# Altium PCB PCB_16522098.PcbDoc
Units mil, origin at the board's own origin, x right, y up, seen from the top; angles counter-clockwise.
Board outline 4110.36 x 4795.8 mil, 2 copper layers (Top Layer, Bottom Layer); 30 components, 82 nets, 286 pads, 46 vias.
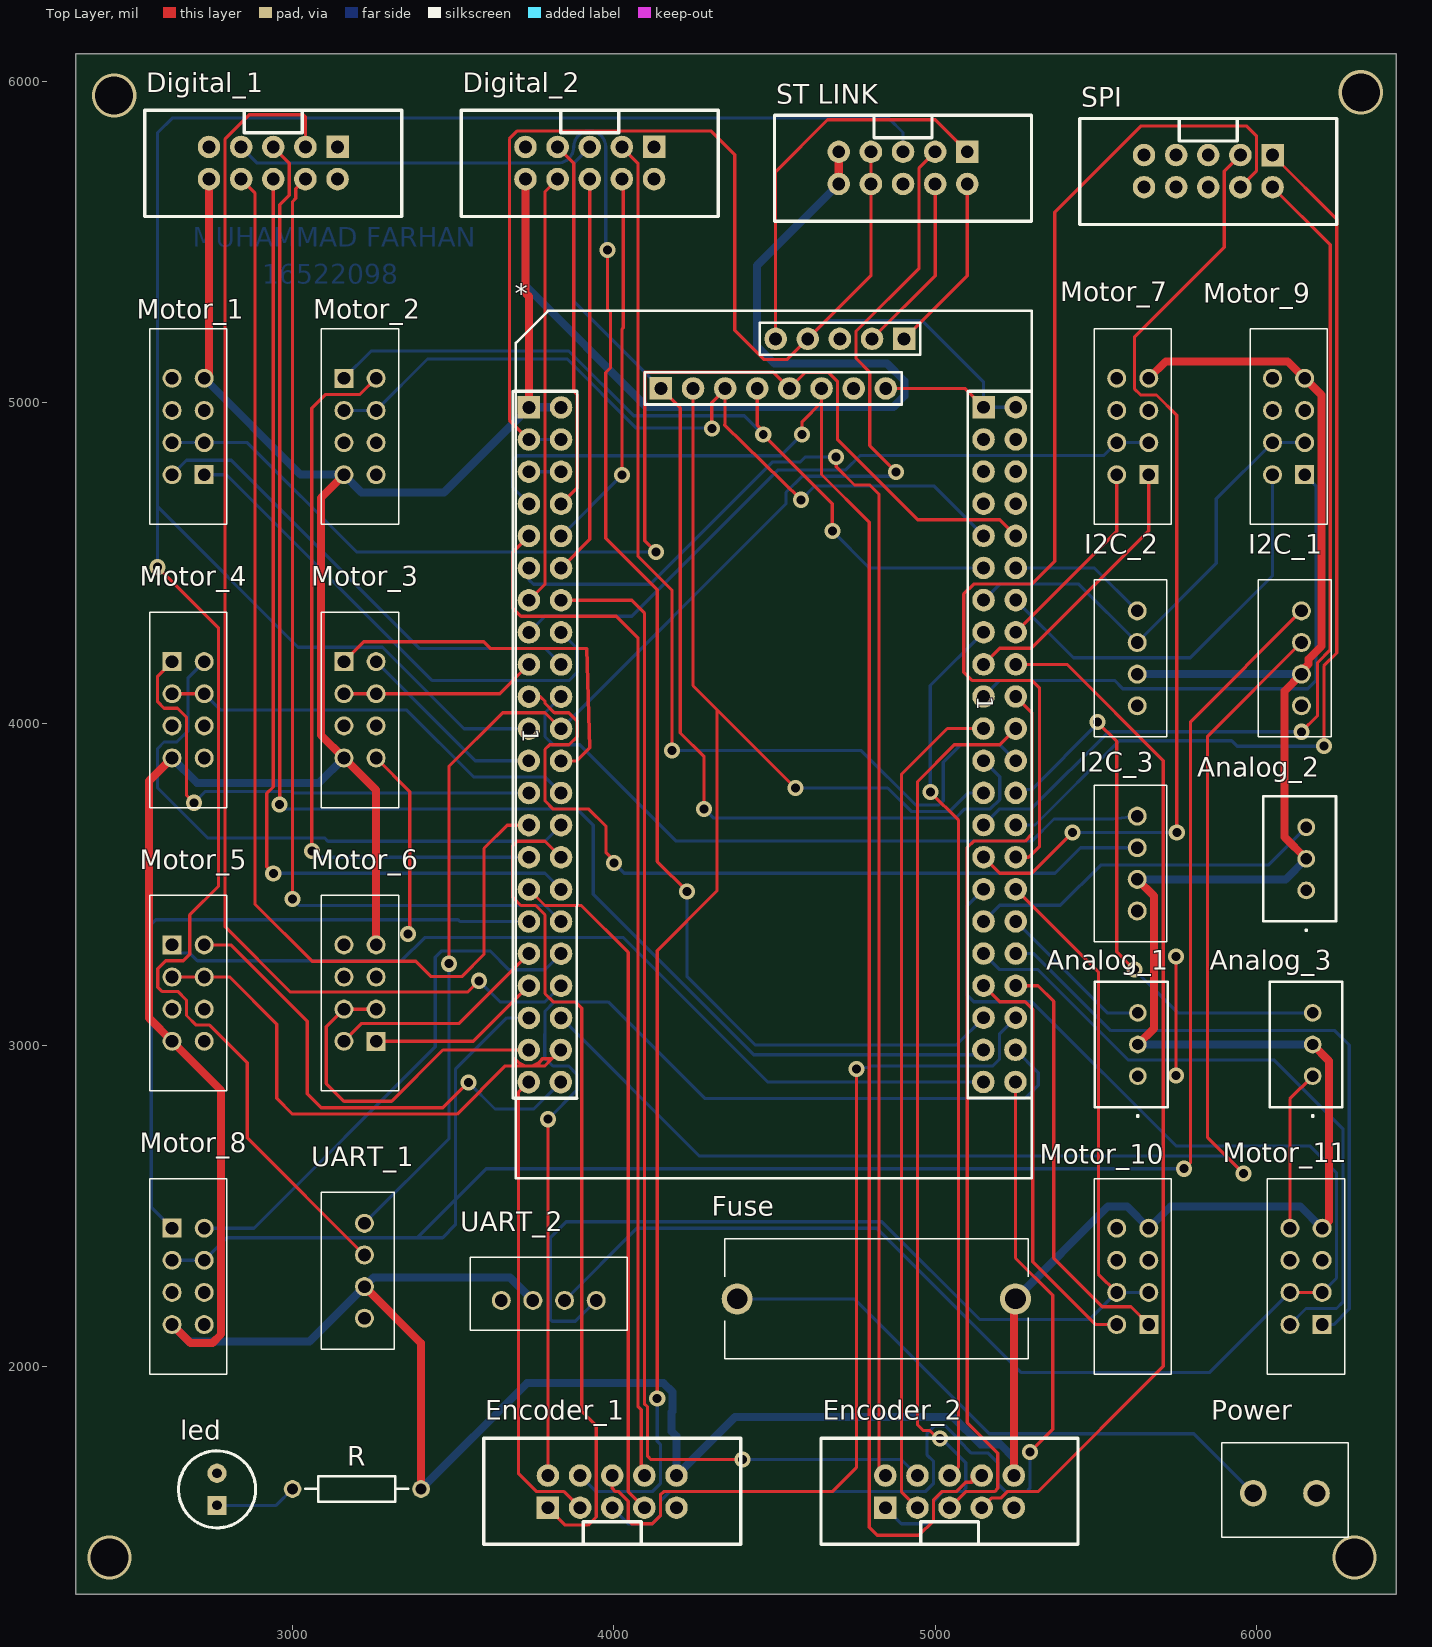
[diagram p0: Top Layer view]
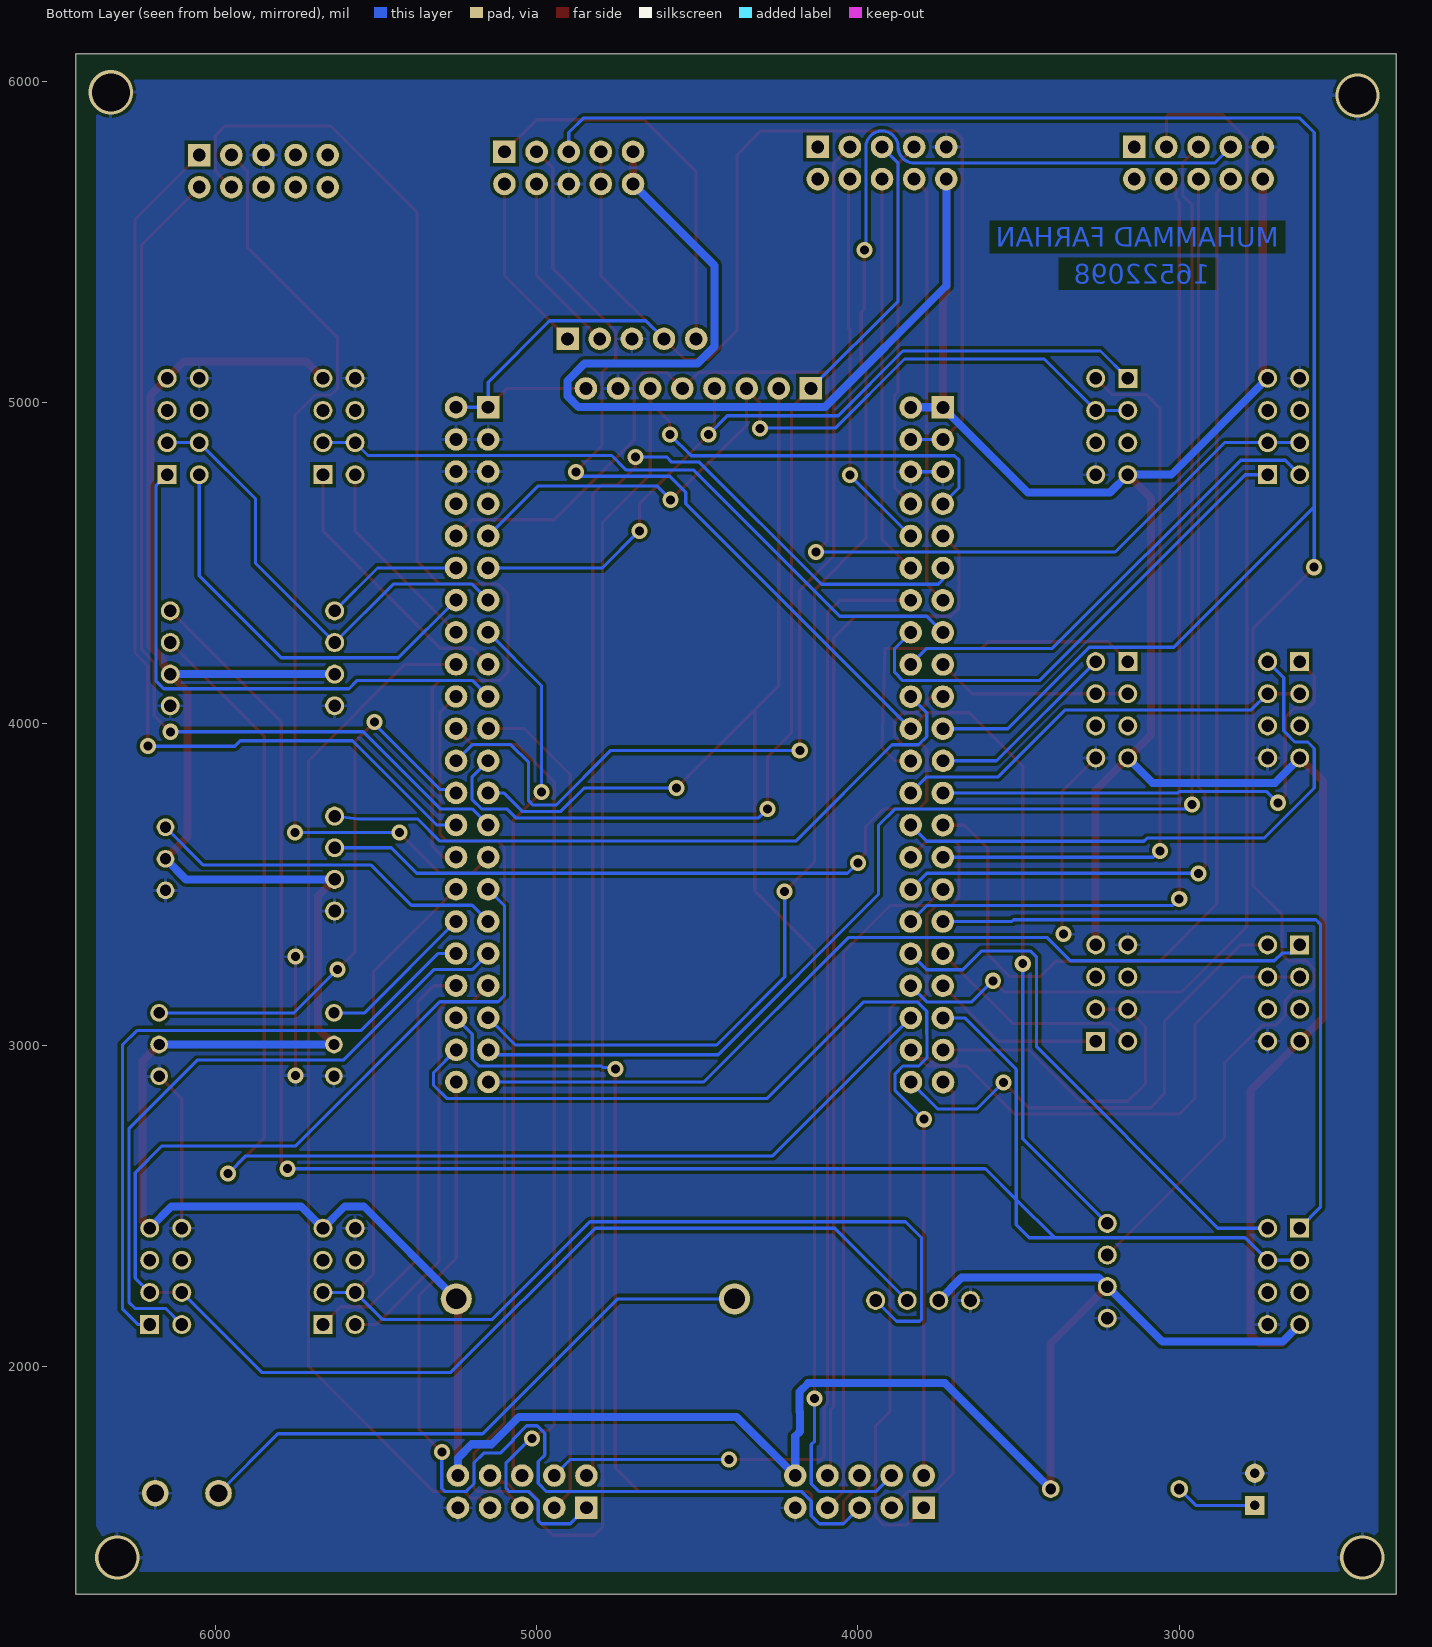
[diagram p1: Bottom Layer view, seen from below]

## Layer stack, top to bottom
Top Solder: solder mask 0.4, Solder Resist, Dk 3.5
Top Layer: signal copper 1.4
Dielectric 1: dielectric 12.6, FR-4, Dk 4.8
Bottom Layer: signal copper 1.4
Bottom Solder: solder mask 0.4, Solder Resist, Dk 3.5

## Board outline
2324.64,6085.8 6435,6085.8 6435,1290 2324.64,1290

## Design rules (kind name [scope] priority, off if disabled: settings)
Clearance [All] p1: gap=10 ignorepadtopadclearanceinfootprint=FALSE except(0: Arc-Hole Track-Hole SMDPad-Hole THPad-Hole Via-Hole Fill-Hole Poly-Hole Region-Hole Text-Hole)
PolygonConnect [All] p1: connectstyle=Relief reliefconductorwidth=10 reliefentries=4 polygonreliefangle="90 Angle" airgapwidth=10
RoutingVias [All] p1: holewidth=28 width=50 viastyle="Through Hole" minholewidth=28 minwidth=50 maxholewidth=28 maxwidth=50
SolderMaskExpansion [All] p1: expansion=4 istentingtop=FALSE
Width Power [InNet('5V')] p1: maxlimit=30 minlimit=20 preferedwidth=25 minimp=50.000000 maximp=50.000000 favimp=50.000000
Width Normal [All] p2: maxlimit=15 minlimit=10 preferedwidth=10 minimp=50.000000 maximp=50.000000 favimp=50.000000
30 further rules are at their usual default settings.

## Components (designator, comment, footprint, x,y, rotation, side; value= is the part's Value field where it differs from the comment)
* "STM32  F407VET6" MICON 4495.08,3935 r0 top
Analog_1 "B3B-XH-A_LF__SN_" B3BXHALFSN 5630.75,2903.15 r90 top
Analog_2 "B3B-XH-A_LF__SN_" B3BXHALFSN 6155,3481.12 r90 top
Analog_3 "B3B-XH-A_LF__SN_" B3BXHALFSN 6175,2903.15 r90 top
Digital_1 "Header ISP" "Header ISP" 3040,5895 r180 top
Digital_2 "Header ISP" "Header ISP" 4025,5895 r180 top
Encoder_1 "Header ISP" "Header ISP" 3895,1460 r0 top
Encoder_2 "Header ISP" "Header ISP" 4945,1460 r0 top
Fuse "C3131" C3131 5250,2210 r180 top (schematic designator Fuse?)
I2C_1 "B4B-XH-A_LF__SN_" B4BXHALFSN 6140,4055.88 r90 top
I2C_2 "B4B-XH-A_LF__SN_" B4BXHALFSN 5628.78,4055.88 r90 top
I2C_3 "B4B-XH-A_LF__SN_" B4BXHALFSN 5628.78,3417.15 r90 top
led "LED 5mm" "LED 5mm" 2765,1617.16 r90 top (schematic designator led?)
Motor_1 "Header ISP" 09181089622 2725,4775 r90 top
Motor_2 "Header ISP" 09181089622 3160,5075 r270 top
Motor_3 "Header ISP" 09181089622 3160,4193.33 r270 top
Motor_4 "Header ISP" 09181089622 2625,4193.33 r270 top
Motor_5 "Header ISP" 09181089622 2625,3311.67 r270 top
Motor_6 "Header ISP" 09181089622 3260,3011.67 r90 top
Motor_7 "Header ISP" 09181089622 5665,4775 r90 top
Motor_8 "Header ISP" 09181089622 2625,2430 r270 top
Motor_9 "Header ISP" 09181089622 6150,4775 r90 top
Motor_10 "Header ISP" 09181089622 5665,2130 r90 top
Motor_11 "Header ISP" 09181089622 6204.25,2130 r90 top
Power "KF301-2P" KF3012P 5990,1605.29 r0 top (schematic designator Power?)
R "Resistor 0.25W" "Resistor 0.25W" 3200,1618.28 r180 top (schematic designator R?)
SPI "Header ISP" "Header ISP" 5950,5870 r180 top
"ST LINK" "Header ISP" "Header ISP" 5000,5880 r180 top
UART_1 "B4B-XH-A_LF__SN_" B4BXHALFSN 3223.78,2149.72 r90 top
UART_2 "B4B-XH-A_LF__SN_" B4BXHALFSN 3649.72,2205 r0 top

## Footprints (in the part's own frame and the unit in brackets; to place one, negate y for a bottom-side part, rotate by r counter-clockwise, add the part's x,y. Pads: shape width x height; smd on the part's side, far side on the other; paste and mask are expansions set on the pad)
09181089622 [mm]
  rect 1.5x1.5 hole 1: 1(0,0)
  round 1.5 hole 1: 2(0,2.54) 3(2.54,0) 4(2.54,2.54) 5(5.08,0) 6(5.08,2.54) 7(7.62,0) 8(7.62,2.54)
  silkscreen extent -3.92,-1.78 11.54,4.32, body extent -3.92,-1.73 11.54,4.27, height 5.25
B3BXHALFSN [mm]
  round 1.4 hole 0.9: 1(0,0) 2(2.5,0) 3(5,0)
  silkscreen extent -3.2,-2.35 7.45,3.4, body extent -2.45,-2.35 7.45,3.4, height 7.09
B4BXHALFSN [mm]
  round 1.5 hole 1: 1(0,0) 2(2.5,0) 3(5,0) 4(7.5,0)
  silkscreen extent -2.45,-2.35 9.95,3.4, body extent -2.45,-2.35 9.95,3.4, height 7.52
C3131 [mm]
  round 2.46 hole 1.64: 1(0,0) 2(22,0)
  silkscreen extent -1,-4.75 23,4.75, body extent -1,-4.75 23,4.75, height 10.6
"Header ISP" [mil]
  rect 70x70 hole 40: 1(-100,100)
  round 70 hole 40: 2(-100,200) 3(0,100) 4(0,200) 5(100,100) 6(100,200) 7(200,100) 8(200,200) 9(300,100) 10(300,200)
  silkscreen extent -300,-14 500,316, body extent -300,-20 501,334, height 365
KF3012P [mm]
  round 2.1 hole 1.4: 1(0,0) 2(5,0)
  silkscreen extent -2.5,-3.5 7.5,4, body extent -2.99,-3.35 7.51,4.15, height 10
"LED 5mm" [mil]
  rect 60x60 hole 30: 1(-50,0)
  round 60 hole 30: 2(50,0)
  silkscreen extent -120,-120 120,120, body extent -117,-118 96,118, height 268
MICON [mil] "STM32F407VET6"
  round 70 hole 40: 3V3(-759.34,949.33) 3V3(-659.34,949.33) 3V3(108.46,1262.79) 3V3(351.3,1108.52) 3V3(755.69,1049.72) 5V(-659.34,1049.33) BOOT0(8.46,1262.79) GND(-759.34,849.33) GND(-659.34,849.33) GND(208.46,1262.79) GND(251.3,1108.52) GND(655.69,849.72) GND(655.69,949.72) GND(755.69,849.72) GND(755.69,949.72) PA0(755.69,-550.28) PA1(655.69,-550.28) PA2(755.69,-450.28) PA3(655.69,-450.28) PA4(755.69,-350.28) PA5(655.69,-350.28) PA6(755.69,-250.28) PA7(655.69,-250.28) PA8(-759.34,149.33) PA9(-659.34,49.33) PA10(-759.34,49.33) PA11(-659.34,-50.67) PA12(-760.12,-50.39) PA15(-659.34,-150.67) PB0(755.69,-50.28) PB1(655.69,-50.28) PB3(-659.34,-750.67) PB5(-759.34,-750.67) PB6(-659.34,-850.67) PB7(-759.34,-850.67) PB8(-660.12,-950.39) PB9(-760.12,-950.39) PB10(655.69,449.72) PB11(755.69,549.72) PB12(-48.7,1108.52) PB12(655.69,549.72) PB13(51.3,1108.52) PB13(755.69,649.72) PB14(-148.7,1108.52) PB14(655.69,649.72) PB15(-759.33,749.33) PB15(151.3,1108.52) PC0(755.69,-750.28) PC1(655.69,-750.28) PC2(755.69,-650.28) PC3(655.69,-650.28) PC4(755.69,-150.28) PC5(-248.7,1108.52) PC5(655.69,-150.28) PC6(-759.34,349.33) PC7(-659.34,249.33) PC8(-759.34,249.33) PC9(-659.34,149.33) PC10(-759.34,-150.67) PC11(-659.34,-250.67) PC12(-759.34,-250.67) PC13(655.69,-850.28) PD0(-659.34,-350.67) PD1(-759.34,-350.67) PD2(-659.34,-450.67) PD3(-759.34,-450.67) PD4(-659.34,-550.67) PD5(-759.34,-550.67) PD6(-659.34,-650.67) PD7(-759.34,-650.67) PD8(-659.33,749.33) PD9(-659.34,649.33) PD10(-759.34,649.33) PD11(-659.34,549.33) PD12(-759.34,549.33) PD13(-659.34,449.33) PD14(-759.34,449.33) PD15(-659.34,349.33) PE0(-660.12,-1050.39) PE1(-760.12,-1050.39) PE2(754.92,-1050) PE3(654.92,-1050) PE4(754.92,-950) PE5(654.92,-950) PE6(755.69,-850.28) PE7(755.69,49.72) PE8(654.92,50) PE9(755.69,149.72) PE10(655.69,149.72) PE11(755.69,249.72) PE12(655.69,249.72) PE13(755.69,349.72) PE14(655.69,349.72) PE15(755.69,449.72) SWDIO(308.46,1262.79) VDD(655.69,749.72) VREF(755.69,749.72)
  rect 70x70 hole 40: 3V3(655.69,1049.72) 5V(-759.34,1049.33) PB1(-348.7,1108.52) SWCLK(408.46,1262.79)
  silkscreen extent -809,-1350 806,1350, body extent -810,-1100 806,1313, height 327
"Resistor 0.25W" [mm]
  round 1.4 hole 0.85: 1(-5.08,0) 2(5.08,0)
  silkscreen extent -4.06,-1.02 4.06,1.02, body extent -5.35,-1.27 5.35,1.33, height 2.7

## Part data
*: library part Micon?, "STM32F407VET6"
Analog_1 Analog_2 Analog_3: "Connector", Arrow Part Number=B3B-XH-A(LF)(SN), Manufacturer_Name="JST (JAPAN SOLDERLESS TERMINALS)", Arrow Price/Stock=https://www.arrow.com/en/products/b3b-xh-a-lf-sn/jst-manufacturing?region=europe, Datasheet Link=https://datasheet.lcsc.com/szlcsc/1812131720_JST-Sales-America-B3B-XH-A-LF-SN_C144394.pdf, Height=7mm, Manufacturer_Part_Number=B3B-XH-A(LF)(SN)
Fuse: "Undefined or Miscellaneous", Manufacturer_Name="Xucheng Elec", Datasheet Link=https://datasheet.lcsc.com/szlcsc/XC-Elec-Shenzhen-5x20-BLX-Fuse-holder_C3131.pdf, Height=10.5mm, Manufacturer_Part_Number=C3131
I2C_1 I2C_2 I2C_3 UART_1 UART_2: "Connector", Arrow Part Number=B4B-XH-A(LF)(SN), Manufacturer_Name="JST (JAPAN SOLDERLESS TERMINALS)", Arrow Price/Stock=https://www.arrow.com/en/products/b4b-xh-a-lf-sn/jst-manufacturing, Datasheet Link=https://datasheet.lcsc.com/szlcsc/JST-Sales-America-B4B-XH-A-LF-SN_C144395.pdf, Height=7mm, Manufacturer_Part_Number=B4B-XH-A(LF)(SN)
Motor_1 Motor_2 Motor_3 Motor_4 Motor_5 Motor_6 Motor_7 Motor_8 Motor_9 Motor_10 Motor_11: library part 09181089622, "Connector", Manufacturer_Name=HARTING, Mouser Part Number=617-09181089622, Datasheet Link=http://uk.rs-online.com/web/p/products/6935182, Height=5.5mm, Manufacturer_Part_Number=09181089622, Mouser Price/Stock=https://www.mouser.co.uk/ProductDetail/HARTING/09181089622?qs=FeiuqfHlVTv2CjJEejdN9Q%3D%3D
Power: "Connector", Manufacturer_Name="Handson Technology", Datasheet Link=http://www.handsontec.com/dataspecs/terminal%20block-5mm.pdf, Height=10mm, Manufacturer_Part_Number=KF301-2P

## Via types
v1: diameter 50, hole 28, Top Layer to Bottom Layer, 42 vias
v2: diameter 137.79, hole 118.11, Top Layer to Bottom Layer, 4 vias

## Nets (pads, with @x,y where several pads share a name; then routed paths per layer and width w, separated by ;. In a path a pad name is that pad's centre, name@x,y a point inside that pad or via, vN(x,y) a via of type N, cw(c..) or ccw(c..) an arc to the next point about the centre after c; other vN are vias at no path point)
3V: "ST LINK.7" "ST LINK.8" *.3V3 | length 4461.4
  Top Layer w10: *.3V3@3735.74,4884.33 3675,4945.07 3675,5820 3700,5845 4302,5845 4376,5771 4376,5224 4466,5134 4539.75,5134 4603.54,5197.79 4800,5394.25 4800,5680 4800,5780 ; *.3V3@4846.38,5043.52 5091.97,5043.52 *.3V3@5150.77,4984.72
  Bottom Layer w10: *.3V3@3735.74,4884.33 *.3V3@3835.74,4884.33 ; *.3V3@4603.54,5197.79 4659.75,5254 4960,5254 5150.77,5063.23 5150.77,4984.72 *.3V3@5250.77,4984.72
5V: "ST LINK.9" "ST LINK.10" *.5V Analog_1.2 Analog_2.2 Analog_3.2 Digital_1.10 Digital_2.10 Encoder_1.10 Encoder_2.10 Fuse.1 I2C_1.2 I2C_2.2 I2C_3.2 Motor_1.7 Motor_2.7 Motor_3.7 Motor_4.7 Motor_5.7 Motor_6.7 Motor_7.7 Motor_8.7 Motor_9.7 Motor_10.7 Motor_11.7 R.1 UART_1.2 UART_2.2 | length 20908.1
  Top Layer w25: Motor_8.7 2682,2073 2751,2073 2778,2100 2778,2858.67 Motor_5.7 2552.97,3083.69 2552.97,3821.31 Motor_4.7 ; Motor_1.7 2740,5090 Digital_1.10 ; Motor_2.7 3087.97,4702.97 3087.97,3965.36 Motor_3.7 3260,3793.33 Motor_6.7 ; UART_1.2 3400,2071.93 R.1 ; Digital_2.10 3725,5340 3735.74,5329.26 *.5V@3735.74,4984.33 ; 4700,5680 4700,5780 ; Encoder_2.10 5245,2205 Fuse.1 ; I2C_3.2 5681,3463.35 5681,3051.83 Analog_1.2 ; Motor_7.7 5718,5128 6097,5128 6202.03,5022.97 6202.03,4241.18 6162.5,4201.65 6162.5,4186.02 6140,4163.52 I2C_1.2 6087,4101.3 6087,3647.55 Analog_2.2 ; Analog_3.2 6226,2950.57 6226,2451.75 Motor_11.7
  Bottom Layer w25: Motor_8.7 2678,2077 3052.63,2077 UART_1.2 3251.63,2276 3677.15,2276 UART_2.2 ; Motor_4.7 2702.19,3816.15 3082.81,3816.15 Motor_3.7 ; Motor_1.7 3025,4775 Motor_2.7 3215,4720 3471.41,4720 3735.74,4984.33 3736.41,4985 3835.07,4985 *.5V@3835.74,4984.33 ; R.1 3729.22,1947.5 4154.68,1947.5 4182.5,1919.68 4182.5,1859.84 4180,1857.34 4180,1797.5 4195,1782.5 Encoder_1.10 4377.5,1842.5 5055.5,1842.5 5140.5,1757.5 5202.5,1757.5 5245,1715 Encoder_2.10 ; Digital_2.10 3725,5363.09 4102.06,4986.02 4870.2,4986.02 4903.88,5019.71 4903.88,5067.34 4850.57,5120.66 4499.36,5120.66 4446.04,5173.97 4446.04,5426.04 4700,5680 ; Fuse.1 5538,2498 5597,2498 Motor_10.7 5733,2498 6136.25,2498 Motor_11.7 ; I2C_3.2 6091.02,3515.57 Analog_2.2 ; I2C_2.2 5629.48,4155 6139.3,4155 I2C_1.2 ; Analog_1.2 5707.57,3001.57 5708,3002 6116.57,3002 6117,3001.57 Analog_3.2
Fuse: Fuse.2 Power.1 | length 1856.6
  Bottom Layer w10: Fuse.2 4748,2210 5168,1790 5805.29,1790 Power.1
GND: "ST LINK.6" *.GND Analog_1.1 Analog_2.1 Analog_3.1 Digital_1.9 Digital_2.9 Encoder_1.9 Encoder_2.9 I2C_1.1 I2C_2.1 I2C_3.1 led.2 Motor_1.8 Motor_2.8 Motor_3.8 Motor_4.8 Motor_5.8 Motor_6.8 Motor_7.8 Motor_8.8 Motor_9.8 Motor_10.8 Motor_11.8 Power.2 SPI.5 UART_1.1 UART_2.1 | length 1577.2
  Top Layer w10: Motor_3.8 3365,3788.33 3365,3350 v1(3360,3345) ; v1(5750,2905) v1(5750,3275) ; Motor_11.8 6104.25,2832.4 Analog_3.1
  Bottom Layer w10: *.GND@3735.74,4784.33 *.GND@3835.74,4784.33 ; v1@5742.35,3282.65 v1(5750,3275)
  other v2: 2430,1405 6305,1405 2445,5955 6325,5965
Netled?_1: led.1 R.2 | length 256.2
  Bottom Layer w10: led.1 2948.89,1567.16 R.2
PA_0: *.PA0 Analog_1.3 | length 497.9
  Bottom Layer w10: *.PA0 5535.5,3100 Analog_1.3
PA_1: *.PA1 Analog_2.3 | length 1125.7
  Bottom Layer w10: *.PA1 5200.77,3434.72 5389.72,3434.72 5515.1,3560.1 6037.13,3560.1 Analog_2.3
PA_2: *.PA2 Motor_10.3 Motor_10.4 UART_2.4 | length 3855.7
  Top Layer w10: *.PA2 5508,3227.5 5508,2287 Motor_10.4
  Bottom Layer w10: UART_2.4 3880,2140 3808,2140 3802,2146 3802,2400 3852,2450 4834,2450 5138,2146 5481,2146 Motor_10.4 Motor_10.3
PA_3: *.PA3 Motor_11.3 Motor_11.4 UART_2.3 | length 4860.1
  Top Layer w10: Motor_11.4 Motor_11.3
  Bottom Layer w10: UART_2.3 4071.57,2430 4818,2430 5267,1981 5855.25,1981 Motor_11.4 ; *.PA3 5100,3433.95 5100,3154.72 5120,3134.72 5301,3134.72 5749.72,2686 6166,2686 6249,2603 6249,2274.75 Motor_11.3
PA_4: *.PA4 SPI.4 | length 3423.6
  Top Layer w10: *.PA4 5290.77,3584.72 5325,3618.95 5325,4110.72 5301,4134.72 5114.55,4134.72 5089.28,4160 5089.28,4404 5120,4434.72 5301,4434.72 5372,4505.72 5372,5592 5640,5860 5970,5860 6000,5830 6000,5720 SPI.4
PA_5: *.PA5 SPI.3 | length 3003.3
  Top Layer w10: *.PA5 5200.77,3534.72 5301,3534.72 v1(5427.28,3661) ; v1(5752,3661) 5752,4960 5689,5023 5640,5023 5620,5043 5620,5203 5900,5483 5900,5720 SPI.3
  Bottom Layer w10: v1(5427.28,3661) v1(5752,3661)
PA_6: *.PA6 SPI.1 | length 3014.3
  Top Layer w10: SPI.1 6250,5570 6250,4220 6210,4180 v1(6210,3930)
  Bottom Layer w10: *.PA6 5310.72,3684.72 5573,3947 5922.59,3947 5939.59,3930 v1(6210,3930)
PA_7: *.PA7 SPI.2 | length 2915.9
  Top Layer w10: SPI.2 6229.53,5490.47 6229.53,4229.79 6190,4190.26 6190,4025 v1(6140,3975)
  Bottom Layer w10: *.PA7 5200.77,3734.72 5299.72,3734.72 5540,3975 v1(6140,3975)
PA_8: *.PA8 I2C_3.3 | length 2532.3
  Top Layer w10: *.PA8 3771.41,4084.33 3785.74,4070 3785.74,4063.62 3815.03,4034.33 3860,4034.33 3886,4008.33 3886,3960 3860.33,3934.33 3800,3934.33 3785.74,3920.07 3785.74,3760 3811.41,3734.33 3921.67,3734.33 3976,3680 3976,3598.57 4000.28,3574.28 v1(4000.28,3566.28)
  Bottom Layer w10: v1(4000.28,3566.28) 4000.8,3566.28 4032.36,3534.72 5373,3534.72 5452.27,3614 I2C_3.3
PA_9: "ST LINK.3" *.PA9 UART_1.4 | length 4514
  Top Layer w10: v1(3487,3253) 3487,3867.33 3654,4034.33 3785.74,4034.33 *.PA9 ; v1(4878,4784) 4796.38,4865.62 4796.38,5094 4753.54,5136.84 4753.54,5221.33 4950,5417.79 4950,5730 5000,5780
  Bottom Layer w10: UART_1.4 3487,2708.22 v1(3487,3253) ; *.PA9 4535.83,4684.42 4535.83,4720 4585.83,4770 4864,4770 v1(4878,4784)
PA_10: "ST LINK.5" *.PA10 UART_1.3 | length 7862
  Top Layer w10: v1(2580,4487) 2770,4297 2770,3495 2680,3405 2680,3282 2660,3262 2605,3262 2580.47,3237.47 2580.47,3180 2593.47,3167 2643,3167 2670,3140 2670,3092 2700,3062 2742,3062 2859,2945 2859,2711.35 UART_1.3
  Bottom Layer w10: v1(2580,4487) 2580,4675 ; *.PA10 3533.67,3984.33 3280,4238 3017,4238 2580,4675 ; 4900,5780 4900,5840 4855,5885 2625,5885 2580,5840 2580,4675
PA_11: *.PA11 Motor_3.1 | length 1205.4
  Top Layer w10: Motor_3.1 3221.67,4255 3595,4255 3615.67,4234.33 3915.67,4234.33 3925,3924.85 3884.48,3884.33 *.PA11
PA_12: *.PA12 Motor_3.2 | length 602.8
  Bottom Layer w10: Motor_3.2 3568.73,3884.61 *.PA12
PA_15: *.PA15 Motor_4.3 Motor_4.4 | length 1338.7
  Top Layer w10: Motor_4.3 Motor_4.4
  Bottom Layer w10: Motor_4.4 2775.33,4043 3354.56,4043 3563.09,3834.47 3785.6,3834.47 *.PA15
PB_0: *.PB0 Digital_2.3 | length 3251.8
  Top Layer w10: Digital_2.3 4075,5745 4075,4522 4181,4416 v1(4181,3917)
  Bottom Layer w10: v1(4181,3917) 4769,3917 4939,3747 5012,3747 5025,3760 5025,3880 5080,3935 5200.5,3935 *.PB0
PB_1: *.PB1 Digital_2.5 | length 3345.3
  Top Layer w10: *.PB1@4146.38,5043.52 4207,4982.91 4207,3971 4281,3897 v1(4281,3735)
  Bottom Layer w10: Digital_2.5 3875,5745 3875,5314.91 *.PB1@4146.38,5043.52 ; v1(4281,3735) 4309,3707 5065,3707 5092.72,3734.72 5171.49,3734.72 5200.77,3764.01 5200.77,3834.72 *.PB1@5150.77,3884.72
PB_3: *.PB3 Digital_1.3 | length 4021.9
  Top Layer w10: Digital_1.3 3040,5889.14 3034.14,5895 2865,5895 2790,5820 2790,3368 2993,3165 3545,3165 v1(3580,3200)
  Bottom Layer w10: v1(3580,3200) 3645.67,3134.33 3785.74,3134.33 *.PB3
PB_5: *.PB5 Motor_6.1 | length 547.3
  Top Layer w10: Motor_6.1 3563.07,3011.67 *.PB5
PB_6: *.PB6 I2C_1.3 | length 4144.9
  Top Layer w10: v1(5960,2600) 5848,2712 5848,3960.73 I2C_1.3
  Bottom Layer w10: *.PB6 4265.07,2655 5905,2655 v1(5960,2600)
PB_7: *.PB7 I2C_1.4 Motor_8.3 Motor_8.4 | length 6070.1
  Top Layer w10: v1(5775,2615) 5795,2635 5795,4006.15 I2C_1.4
  Bottom Layer w10: Motor_8.3 Motor_8.4 2795,2400 3388,2400 ; *.PB7 3667.33,3084.33 3507,2924 3507,2519 ; v1(5775,2615) 3603,2615 3507,2519 ; 3388,2400 3507,2519 ; 3388,2400 3467,2400 3507,2440 3507,2519
PB_8: *.PB8 Motor_5.3 Motor_5.4 | length 1900.9
  Top Layer w10: Motor_5.3 Motor_5.4 2804.33,3211.67 2951,3065 2951,2834 3000,2785 3512,2785 3662,2935 3693.66,2935 ; 3693.03,2957.07 3693.66,2935 ; 3776.91,2957.07 3776.91,2957 ; *.PB8 3807.36,2957 ; 3693.66,2935 3693.66,2934.61 3734.97,2934.61 ; 3693.66,2935 3693.66,2956.44 ; 3693.66,2956.44 ccw(c3734.97,2984.61) 3734.97,2934.61 ; 3693.66,2956.44 ccw(c3734.97,2984.61) 3734.97,2934.61 ; 3734.97,2934.61 ccw(c3734.97,2984.61) 3776.27,2956.44 cw(c3734.97,2984.61) 3734.97,2934.61 ; 3734.97,2934.61 3761.61,2934.61 ; 3761.61,2934.61 3784.97,2934.61 3807.36,2957 ; 3761.61,2934.61 3776.91,2957 ; 3776.91,2957 3807.36,2957
PB_9: *.PB9 Motor_6.3 Motor_6.4 | length 1073.3
  Top Layer w10: Motor_6.3 Motor_6.4 3105,3056.67 3105,2880 3160,2825 3308.27,2825 3467.88,2984.61 *.PB9
PB_10: *.PB10 I2C_2.3 Motor_9.3 Motor_9.4 | length 1470.9
  Bottom Layer w10: *.PB10 5200.77,4434.72 5446.78,4434.72 I2C_2.3 5875,4498.95 5875,4700 Motor_9.4 Motor_9.3
PB_11: *.PB11 I2C_2.4 | length 433.3
  Bottom Layer w10: *.PB11 5495.21,4484.72 I2C_2.4
PB_12: *.PB12 Motor_2.1 | length 2506.7
  Top Layer w10: *.PB12@4446.38,5043.52 4446.38,4929.44 4465,4910.82 v1(4465,4900) 4680,4685 v1(4680,4600)
  Bottom Layer w10: Motor_2.1 3245,5160 3860,5160 4061.48,4958.52 4406.48,4958.52 v1(4465,4900) ; v1(4680,4600) 4795.28,4484.72 *.PB12@5150.77,4484.72
PB_13: *.PB13 Motor_1.3 Motor_1.4 | length 3734.2
  Top Layer w10: v1(4131,4534.33) 4096,4569.33 4096,5094 4495.91,5094 4546.38,5043.52 4596.38,5093.52 4667.09,5093.52 4696.38,5064.23 4696.38,4883.62 4945.28,4634.72 5200.77,4634.72 *.PB13@5250.77,4584.72
  Bottom Layer w10: Motor_1.4 Motor_1.3 2859,4875 3199.67,4534.33 v1(4131,4534.33)
PB_14: *.PB14 Motor_2.3 Motor_2.4 | length 2540
  Top Layer w10: v1(4305,4918.52) 4305,4998.89 *.PB14@4346.38,5040.27 ; *.PB14@4346.38,5043.52 *.PB14@4346.38,5040.27 ; v1(4583,4697) 4345.4,4928.93 4346.38,4933.62 *.PB14@4346.38,5040.27
  Bottom Layer w10: Motor_2.3 Motor_2.4 3420,5135 3855,5135 4070,4920 4303.52,4920 v1(4305,4918.52) v1@4305,4915 ; v1(4583,4697) 4626,4740 4995.5,4740 *.PB14@5150.77,4584.72
PB_15: *.PB15 Encoder_2.8 | length 5309.5
  Top Layer w10: v1(4585,4900) 4586,4901 4586,4940 4646.38,5000.38 ; *.PB15@4646.38,5043.52 4646.38,5000.38 ; Encoder_2.8 5115,1660 5115,1639 5094.71,1639 5065.71,1610 5020,1610 4995,1585 4995,1520 4949,1474 4820,1474 4795,1499 4795,4627 4646.38,4775.62 4646.38,5000.38
  Bottom Layer w10: *.PB15@3735.75,4684.33 3685,4735.08 3685,4820 3699.33,4834.33 4519.33,4834.33 v1(4585,4900)
PC_0: *.PC0 Motor_10.1 | length 1319
  Top Layer w10: *.PC0 5320,3184.72 5369,3135.72 5369,2336.94 5520.47,2185.47 5609.53,2185.47 Motor_10.1
PC_1: *.PC1 Motor_10.2 | length 1311.1
  Top Layer w10: *.PC1 5200.77,3134.72 5280,3134.72 5304,3110.72 5304,2325.55 5499.55,2130 Motor_10.2
PC_2: *.PC2 Motor_11.1 | length 2082.2
  Bottom Layer w10: *.PC2 5307.28,3284.72 5547,3045 6244,3045 6289,3000 6289,2179 6240,2130 Motor_11.1
PC_3: *.PC3 Motor_11.2 | length 2077.6
  Bottom Layer w10: *.PC3 5200.77,3234.72 5320,3234.72 5601.72,2953 6056,2953 6269,2740 6269,2200 6249,2180 6154.25,2180 Motor_11.2
PC_4: *.PC4 Analog_3.3 | length 1776.9
  Top Layer w10: v1(5505,4005) 5565,3945 5565,3290 v1(5620,3235)
  Bottom Layer w10: *.PC4 5261.05,3795 5300,3795 5505,4000 v1(5505,4005) ; v1(5620,3235) 5755,3100 Analog_3.3
PC_5: *.PC5 Encoder_1.4 | length 4786.7
  Top Layer w10: v1(4135,1900) 4135,3294 4321,3480 4321,4044 ; *.PC5@4246.38,5043.52 4246.38,4968.91 4246.38,4118.62 4321,4044 ; v1(4565,3800) 4321,4044
  Bottom Layer w10: Encoder_1.4 3945,1610 4120,1610 4145,1635 4145,1757.09 4135,1767.09 v1(4135,1900) ; v1(4565,3800) 4852,3800 4925,3727 5045,3727 5102.72,3784.72 *.PC5@5150.77,3784.72
PC_6: *.PC6 Motor_7.3 Motor_7.4 | length 2173.9
  Bottom Layer w10: *.PC6 3785.74,4334.33 4056.33,4334.33 4512,4790 4722,4790 4766.72,4834.72 5524.72,4834.72 Motor_7.4 Motor_7.3
PC_7: *.PC7 Motor_1.2 | length 1492.7
  Bottom Layer w10: Motor_1.2 2670,4820 2809,4820 3394.67,4234.33 3785.74,4234.33 *.PC7
PC_8: *.PC8 Motor_3.3 Motor_3.4 | length 613.4
  Top Layer w10: Motor_3.3 Motor_3.4 3644.74,4093.33 *.PC8
PC_9: *.PC9 I2C_3.4 | length 2151.9
  Bottom Layer w10: *.PC9 3785.74,4034.33 3785.74,3960 3811.41,3934.33 3894,3934.33 4193.61,3634.72 5301,3634.72 5369.85,3703.57 5555.44,3703.57 I2C_3.4
PC_10: *.PC10 Motor_4.1 | length 1588.3
  Top Layer w10: Motor_4.1 2580,4148.33 2580,4068 2600,4048 2642,4048 2670,4020 2670,3777 v1(2693,3754)
  Bottom Layer w10: v1(2693,3754) 2727.65,3788.65 3000,3788.65 3004.31,3784.33 *.PC10
PC_11: *.PC11 Motor_4.2 | length 1821.9
  Bottom Layer w10: Motor_4.2 2675,4143.33 2675,3978 2640,3943 2600,3943 2580,3923 2580,3800 2735.67,3644.33 3100,3644.33 3110,3634.33 3785.74,3634.33 *.PC11
PC_12: *.PC12 Digital_1.8 | length 3608.7
  Top Layer w10: Digital_1.8 2883,5652 2883,3439 3061,3261 3384,3261 3432,3213 3527,3213 3596,3282 3596,3612 3668.33,3684.33 *.PC12
PC_13: *.PC13 Digital_1.7 | length 4986.9
  Top Layer w10: v1(3980,5475) 3980,5290.74 3989.61,5281.13 3989.61,5107.69 3975,5093.09 3975,4577 4135,4417 4135,3571 v1(4228,3478)
  Bottom Layer w10: Digital_1.7 2887.07,5747.93 2890,5745 2940,5745 3825,5745 ccw(c3825,5795) 3875,5795 cw(c3925,5795) 3975,5795 3975,5480 v1(3980,5475) ; v1(4228,3478) 4228,3212 4440,3000 5066.05,3000 *.PC13
PD_0: *.PD0 Encoder_1.1 | length 2623.8
  Top Layer w10: Encoder_1.1 3849,1506 3920,1506 3945,1531 3945,1815 3900,1860 3900,3114.33 3880,3134.33 3811.41,3134.33 3785.74,3160 3785.74,3405.04 3756.45,3434.33 3710.67,3434.33 3685,3460 3685,3620 3699.33,3634.33 3785.74,3634.33 *.PD0
PD_1: *.PD1 Motor_2.2 | length 2300.2
  Top Layer w10: v1(3060,3604.33) 3060,4982 3103,5025 3210,5025 Motor_2.2
  Bottom Layer w10: v1(3060,3604.33) 3080,3584.33 *.PD1
PD_2: *.PD2 Digital_1.6 | length 3093.7
  Top Layer w10: v1(2940,3534.33) 2920,3554.33 2920,3783 2940,3803 Digital_1.6
  Bottom Layer w10: v1(2940,3534.33) 3785.74,3534.33 *.PD2
PD_3: *.PD3 Encoder_1.7 | length 2139.5
  Top Layer w10: *.PD3 3785.74,3434.33 3899,3434.33 4045,3288.33 4045,1610 Encoder_1.7
PD_4: *.PD4 Digital_1.4 | length 3121.6
  Top Layer w10: v1(3000,3455) 3000,5625 3010,5635 3010,5665 Digital_1.4
  Bottom Layer w10: v1(3000,3455) 3020.67,3434.33 3785.74,3434.33 *.PD4
PD_5: *.PD5 Motor_8.1 | length 2156.3
  Bottom Layer w10: Motor_8.1 2560.47,2494.53 2560.47,3376.19 2574.28,3390 3515.39,3390 3521.06,3384.33 *.PD5
PD_6: *.PD6 Motor_8.2 | length 1676.7
  Bottom Layer w10: Motor_8.2 2880,2430 3444,2994 3444,3273 3464,3293 3614.62,3293 3673.29,3234.33 3785.74,3234.33 *.PD6
PD_7: *.PD7 Motor_6.2 | length 688.7
  Top Layer w10: Motor_6.2 3215.47,3067.14 3518.55,3067.14 *.PD7
PD_8: *.PD8 Digital_2.7 | length 1156.7
  Top Layer w10: Digital_2.7 3875,5745 3875,5034 3886,5023 3886,4734.58 *.PD8
PD_9: *.PD9 Digital_2.4 | length 1192.9
  Top Layer w10: v1(4025,4773.59) 4025,5227.37 4029.61,5231.98 4029.61,5690.39 Digital_2.4
  Bottom Layer w10: *.PD9 v1(4025,4773.59)
PD_10: *.PD10 Encoder_1.8 | length 3295.2
  Top Layer w10: *.PD10 3685,4533.59 3685,4360 3710.67,4334.33 4008,4334.33 4075,4267.33 4075,1875.15 4085,1865.15 4085,1690 4095,1690 Encoder_1.8
PD_11: *.PD11 Digital_2.6 | length 1247.6
  Top Layer w10: *.PD11 3925,4573.59 Digital_2.6
PD_12: *.PD12 Encoder_2.2 | length 4423.3
  Top Layer w10: v1(4692,4830) 4692,4800 4749,4743 4797,4743 4825,4715 4825,1680 Encoder_2.2
  Bottom Layer w10: *.PD12 3735.74,4448.59 3750,4434.33 4113.33,4434.33 4493.33,4814.33 4579.42,4814.33 4595.09,4830 v1(4692,4830)
PD_13: *.PD13 Encoder_2.4 | length 3769.5
  Top Layer w10: *.PD13 4055.67,4384.33 4095,4345 4095,1883.43 4105,1873.43 4105,1720 4115,1710 v1(4401,1710)
  Bottom Layer w10: v1(4401,1710) 4895,1710 Encoder_2.4
PD_14: *.PD14 Digital_2.8 | length 1347.7
  Top Layer w10: *.PD14 3785.74,4434.33 3785.74,4605.04 3785.75,4763.61 3785.74,5655.74 Digital_2.8
PD_15: *.PD15 Motor_1.1 | length 1582.2
  Bottom Layer w10: Motor_1.1 2794.53,4775 3435.2,4134.33 3860.33,4134.33 3886,4160 3886,4234.07 *.PD15
PE_0: *.PE0 Motor_5.2 | length 1554
  Top Layer w10: Motor_5.2 2808.33,3311.67 3046,3074 3046,2848 3089,2805 3468,2805 v1(3547,2884)
  Bottom Layer w10: v1(3547,2884) 3630,2801 3751.36,2801 *.PE0
PE_1: *.PE1 Encoder_1.3 | length 1467.2
  Top Layer w10: *.PE1 3703,2852.64 3703,1667 3760,1610 3845,1610 Encoder_1.3
PE_2: *.PE2 Encoder_1.5 | length 3065
  Top Layer w10: *.PE2 5250,2337 5366,2221 5366,1804 v1(5295,1733)
  Bottom Layer w10: Encoder_1.5 4045,1510 4120,1510 4145,1535 4145,1580.71 4174.29,1610 4969.14,1610 4995,1635.86 4995,1703.71 4975,1723.71 4975,1791.57 4998.43,1815 5031.57,1815 5073,1773.57 5073,1770 5113,1730 5165,1730 5195,1700 5195,1635 5220,1610 5285,1610 5295,1620 v1(5295,1733)
PE_3: *.PE3 Motor_5.1 | length 2761.7
  Bottom Layer w10: Motor_5.1 2650.67,3286 2680,3286 2704,3262 3338.57,3262 3410.9,3334.33 4029.93,3334.33 4479.26,2885 4800.41,2885 *.PE3
PE_4: *.PE4 Encoder_1.2 | length 3381.3
  Top Layer w10: Encoder_1.2 v1(3795,2769)
  Bottom Layer w10: v1(3795,2769) 3885,2859 3885,2909.61 3860,2934.61 3810.36,2934.61 3784.97,2960 3784.97,3034 3785.74,3034.77 3785.74,3105.04 3815.03,3134.33 3982,3134.33 4282.33,2834 5280,2834 5321,2875 5321,2914 *.PE4
PE_5: *.PE5 Digital_1.5 | length 4724.7
  Top Layer w10: Digital_1.5 2990,5745 2990,5645 2960,5615 v1(2960,3748)
  Bottom Layer w10: v1(2960,3748) 2973.67,3734.33 3886,3734.33 3936,3684.33 3936,3469 4435,2970 5118.76,2970 5133.76,2985 *.PE5
PE_6: *.PE6 Encoder_1.6 | length 2839.9
  Top Layer w10: Encoder_1.6 3995,1620 4005,1610 4015.71,1610 4045,1580.71 4045,1520 4055,1510 4120,1510 4145,1535 4145,1600 4155,1610 4680,1610 4755,1685 v1(4755,2925)
  Bottom Layer w10: v1(4755,2925) 4760,2930 4795,2930 4800,2935 5180,2935 5200,2955 5200,3033.95 *.PE6
PE_7: *.PE7 Encoder_2.1 | length 3006.7
  Top Layer w10: v1(5015,1775) 5009.09,1775 4983.76,1800.33 4962.67,1800.33 4945,1818 4945,3820 5059.72,3934.72 5200.77,3934.72 *.PE7
  Bottom Layer w10: Encoder_2.1 4895,1510 4985,1510 4995,1520 4995,1580.71 5024.29,1610 5085,1610 5095,1620 5095,1700 5020,1775 v1(5015,1775)
PE_8: *.PE8 Encoder_2.3 | length 2616.9
  Top Layer w10: Encoder_2.3 4895,1610 4895,3842 5038,3985 *.PE8
PE_9: *.PE9 Encoder_2.5 | length 2876.7
  Top Layer w10: Encoder_2.5 5095,1610 5185,1610 5195,1620 5195,1730 5100,1825 5100,3614.72 5120,3634.72 5280,3634.72 5301,3655.72 5301,4034.5 *.PE9
PE_10: *.PE10 Motor_9.1 | length 1731.4
  Bottom Layer w10: *.PE10 5200.77,4134.72 5558.28,4134.72 5584,4109 6160,4109 6185,4134 6185,4740 Motor_9.1
PE_11: *.PE11 Encoder_2.7 | length 3215.6
  Top Layer w10: Encoder_2.7 5175,1590 5204.29,1590 5224.29,1610 5320,1610 5710,2000 5710,3885 5410.28,4184.72 *.PE11
PE_12: *.PE12 Motor_7.1 | length 861.2
  Top Layer w10: *.PE12 5200.77,4234.72 5299.72,4234.72 5665,4600 Motor_7.1
PE_13: *.PE13 Motor_7.2 | length 620.4
  Top Layer w10: *.PE13 5565,4598.95 Motor_7.2
PE_14: *.PE14 Encoder_2.6 | length 2741.4
  Top Layer w10: v1(4985,3787) 5073,3699 5073,1688 Encoder_2.6
  Bottom Layer w10: v1(4985,3787) 4985,4118.95 *.PE14
PE_15: *.PE15 Motor_9.2 | length 1294
  Bottom Layer w10: *.PE15 5430.5,4205 5794.58,4205 6050,4460.42 Motor_9.2
RST: "ST LINK.1" *.BOOT0 | length 1225.5
  Top Layer w10: *.BOOT0 4503.54,5718.54 4665,5880 5000,5880 5100,5780
SWCLK: "ST LINK.2" *.SWCLK | length 563.6
  Top Layer w10: *.SWCLK 5100,5394.25 5100,5680
SWDIO: "ST LINK.4" *.SWDIO | length 563.6
  Top Layer w10: *.SWDIO 5000,5394.25 5000,5680
pads on no net: *.VDD *.VREF Digital_1.1 Digital_1.2 Digital_2.1 Digital_2.2 Motor_1.5 Motor_1.6 Motor_2.5 Motor_2.6 Motor_3.5 Motor_3.6 Motor_4.5 Motor_4.6 Motor_5.5 Motor_5.6 Motor_6.5 Motor_6.6 Motor_7.5 Motor_7.6 Motor_8.5 Motor_8.6 Motor_9.5 Motor_9.6 Motor_10.5 Motor_10.6 Motor_11.5 Motor_11.6 SPI.6 SPI.7 SPI.8 SPI.9 SPI.10

## Polygon pours and split planes (outlines as drawn)
GND on Bottom Layer "GND_L02_P000" (solid, pour order 0): 2380,5895 2490,6005 6260,6005 6370,5895 6370,1502.86 6290,1360 2505,1360 2380,1485

## Other copper
Bottom Layer:
  text "MUHAMMAD FARHAN" at 2690,5485 h60
  text "16522098" at 2905,5370 h60

## Text inside footprints (layer, text, board x,y; h text height)
*: Top Overlay "1" at 5130.77,4084.72 h50 r270; Top Overlay "1" at 3715.74,3984.33 h50 r270